# Allegro board d7-water-2024030401.brd
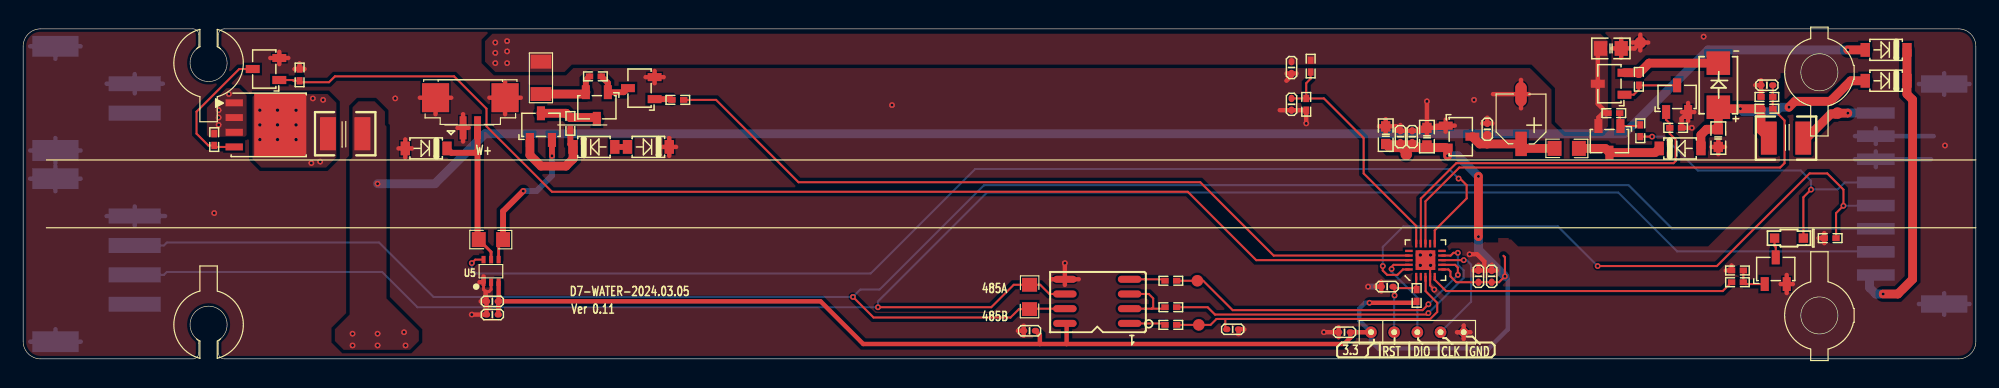
[diagram p0: board, top side]
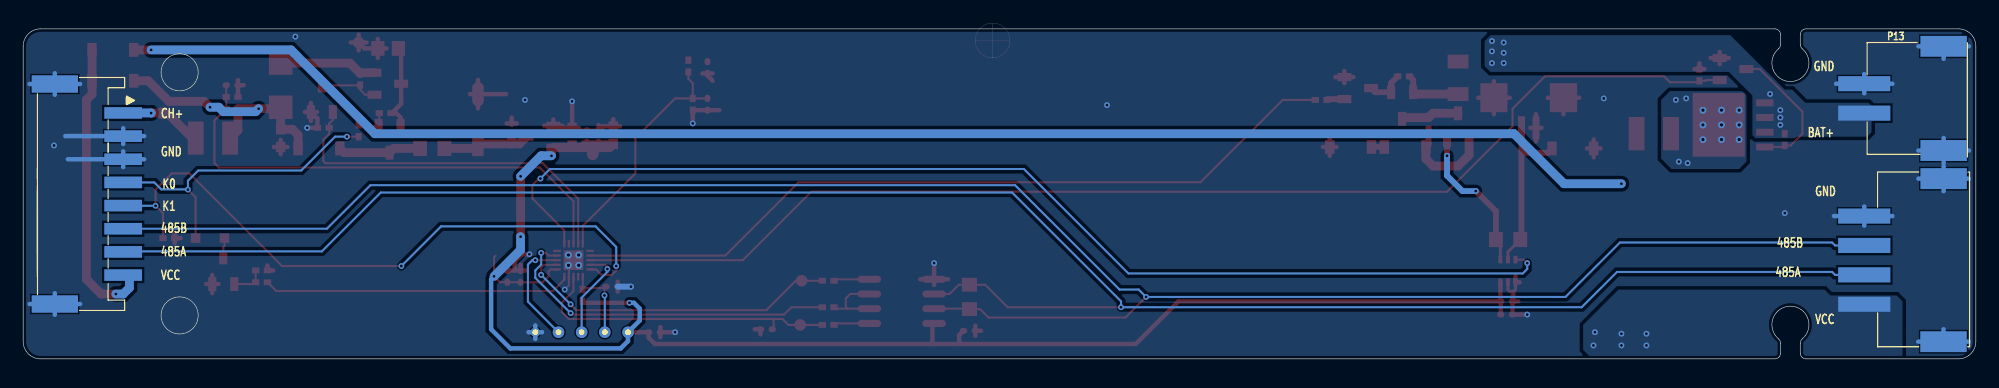
[diagram p1: board, bottom side, seen from below]

Outline 168.5 x 28.5 mm; copper layers: TOP, BOTTOM. Coordinates in mm from the lower left corner of the outline.
Outline path: circle c155,24.75 r1.6 ; circle c155,3.75 r1.6 ; 0,27 0,1.5 arc(0.44,0.44) 1.5,0 14.65,0 arc(15,0.15) 15.15,0.5 15.15,1.34 arc(15.1,1.55) 14.97,1.72 arc(16,4.55) 17.03,1.72 arc(16.9,1.55) 16.85,1.34 16.85,0.5 arc(17,0.15) 17.35,0 167,0 arc(168.06,0.44) 168.5,1.5 168.5,27 arc(168.06,28.06) 167,28.5 17.35,28.5 arc(17,28.35) 16.85,28 16.85,27.16 arc(16.9,26.95) 17.03,26.78 arc(16,23.95) 14.97,26.78 arc(15.1,26.95) 15.15,27.16 15.15,28 arc(15,28.35) 14.65,28.5 1.5,28.5 arc(0.44,28.06) 0,27

## Design rules (mm)
net group POWER: nets +3.3V CH+ N1716048 VIN W+

## Placement (name value [footprint] x y rotation side)
C2  104  [C0603]  146.28 19.06 270 top
C4  104  [C0402]  126.34 19.83 90 top
C5  22uF/6.3V  [C0603]  117.58 19.32 90 top
C6  22uF/6.3V  [C0603]  121.13 19.19 90 top
C7  103  [C0402]  118.85 19.19 90 top
C8  104  [C0402]  119.86 19.19 90 top
C14  104  [C0402]  150.47 23.64 180 top
C15  104  [C0402]  40.49 3.82 180 top
C26  105  [C0402]  126.72 7.13 90 top
C31  104  [C0402]  109.45 25.16 90 top
C32  104  [C0402]  109.45 21.98 270 top
C43  105  [C0402]  40.49 4.97 0 top
C54  105  [C0402]  114.02 2.3 180 top
C55  105  [C0402]  125.58 7.13 90 top
C56  103  [C0402]  86.84 2.43 180 top
C60  104  [C0402]  117.7 6.24 0 top
C61  103  [C0402]  104.37 2.55 180 top
D1  ST34F  [SMA]  146.28 23.64 270 top
D2  3.6V  [SOD_323]  152.38 10.43 0 top
D4  IN5819WS  [SOD123]  34.77 18.17 180 top
D5  BZT52C12  [SOD123]  49.25 18.3 0 top
D8  B5817W  [SOD123]  53.95 18.3 180 top
D10  IN4001  [SOD123]  142.98 18.17 0 top
D11  IN4001  [SOD123]  160.76 24.02 180 top
D12  IN4001  [SOD123]  160.76 26.68 180 top
EC1  4.7UF/25V  [C0805]  137.01 26.81 0 top
EC2  10UF/35V  [CAP_SMD_040X054]  129.26 20.71 270 top
F1  1100mA/16V  [1210]  152.12 19.06 180 top
F3  0.5R  [1210]  27.79 19.44 0 top
F4  16V/1A  [R1206]  44.68 24.27 270 top
P2  8PIN  [CON_008_SMD_WT_P020]  159.87 14.24 270 bottom
P5  2.54 4PIN  [CON_XH_254_4P]  9.63 8.52 90 bottom
P12  HEADER 4  [CON_125_02P_WT_H]  38.58 19.95 180 top
P13  HEADER 4  [CON_XH_254_2P]  9.63 21.22 90 bottom
P14  HEADER 5  [DEBUG5_DIP]  116.31 2.3 0 top
Q2  2N7002  [SOT_23]  142.72 22.62 0 top
Q3  MMBT3906  [SOT_23]  136.88 18.81 180 top
Q4  2N7002  [SOT_23]  20.8 25.03 90 top
Q5  2N7002  [SOT_23]  151.23 7.76 0 top
Q6  ss8050  [SOT_23]  44.68 20.21 0 top
Q7  2N3904  [SOT_23]  53.19 23.38 90 top
QL2  AON7401-HXY  [DFN5X6_8L]  21.18 20.21 0 top
QL3  Si2319DS  [SOT_23]  136.88 23.76 90 top
QL5  Si2319DS  [SOT_23]  49.51 21.73 180 top
R1  10R  [R0805]  133.2 18.17 0 top
R3  10K  [R0402]  150.47 21.6 180 top
R4  510K  [R0402]  139.42 24.14 90 top
R7  1K  [R0402]  150.47 22.62 0 top
R19  100K  [R0402]  23.85 24.52 270 top
R20  1K  [R0402]  147.93 6.62 180 top
R22  3K  [R0402]  155.93 10.43 0 top
R26  10M  [R0402]  111.1 25.29 90 top
R27  1.6M  [R0402]  110.72 21.98 270 top
R32  1.7K  [R0402]  47.22 20.33 90 top
R36  100K  [R0402]  147.93 7.63 0 top
R41  10R  [R0402]  99.04 6.74 0 top
R44  5.1K  [R0402]  16.49 18.94 270 top
R72  10R  [R0402]  99.04 4.46 0 top
R73  10R  [R0402]  99.04 2.93 0 top
R74  120R  [R0805]  86.84 5.35 90 top
R77  100K  [R0402]  137.26 21.22 180 top
R78  5.6K  [R0402]  139.55 19.7 90 top
R87  2K  [R0402]  56.49 22.37 0 top
R88  5.1K  [R0402]  49.38 24.4 0 top
R89  10K  [R0402]  120.24 5.47 270 top
R90  100K  [R0402]  142.6 19.95 180 top
RL2  100mR 1% 250mW  [R0805]  40.36 10.3 180 top
T1  TP_0.8mm  [TP_10]  156.57 21.22 0 top
T3  TP_0.8mm  [TP_10]  139.55 27.32 0 top
T8  TP_0.8mm  [TP_10]  119.36 17.67 0 top
T20  TP_0.8mm  [TP_10]  101.45 2.93 0 top
T21  TP_0.8mm  [TP_10]  101.32 6.74 0 top
U1  RS7533-1YF3  [SOT_23]  124.05 19.19 270 top
U5  TPA191  [SOT-363]  39.73 6.62 90 top
U12  CS48505S  [SO_8]  92.69 4.97 180 top
U14  HK32F0301MF4N7C  [QFN020Q_P040_035X035]  121.01 8.52 0 top

## Library data of the parts
C2 C4-C8 C14 C15 C26 C31 C32 C43 C54-C56 C61 EC1 = C_4
C60 EC2 = C_0
D1 = ZHCS1000/SOT_10
D2 = DIODE BREAKDOWN
D4 = ZHCS1000/SOT_12
D5 = DIODE BREAKDOWN_0
D8 = DIODE SCHOTTKY_2
D10-D12 = DIODE SCHOTTKY_3
F1 F3 F4 = FUSE
P2 = HEADER 12_12
P5 = HEADER 4_5
P12 P13 = HEADER 4_11
P14 = HEADER 4_9
Q2 Q5 = 2N7002_0
Q3 = PNP BCE_2
Q4 = 2N7002
Q6 = 2N3904_10
Q7 = 2N3904_0
QL2 = P DGS_5
QL3 = P DGS_2
QL5 = MOSFET P DGS_1
R1 R3 R4 R7 R19 R20 R22 R26 R27 R32 R36 R41 R44 R72-R74 R77 R78 R87 R88 R90 RL2 = R_1
R89 = R_0
T1 T3 T8 T20 T21 = TestPoint
U1 = UPC2746T/SOT_5
U5 = LM3875/TO220_8
U12 = LM3875/TO220_6
U14 = BA3430F/SO_11

## Footprints (pads in the part's own frame, mm; a bottom-side part is the same pattern mirrored in y, then rotated)
1210
  custom 1.372x2.87 smd: 1(-1.486,0) 2(1.486,0)
C0402
  oval 0.635x0.508 smd: 1(-0.508,0) 2(0.508,0)
C0603
  rect 0.889x0.813 smd: 1(-0.762,0) 2(0.762,0)
C0805
  rect 1.143x1.27 smd: 1(-0.889,0) 2(0.889,0)
CAP_SMD_040X054
  rect 2.1x1 smd: 1(2.153,-0.004)
  oval 2.1x1 smd: 2(-2.148,-0.01)
CON_008_SMD_WT_P020
  rect 1x3.25 smd: 1(-7,0) 2(-5,0) 3(-3,0) 4(-1,0) 5(1,0) 6(3,0) 7(5,0) 8(7,0)
  rect 1.5x4 smd: 9(-9.5,-5.9) 10(9.5,-5.9)
CON_125_02P_WT_H
  rect 0.6x2 smd: 1(0.625,0) 2(-0.625,0)
  rect 2.35x2.5 smd: 3(-3,-2.6) 4(3,-2.6)
CON_XH_254_2P
  rect 1.3x4.5 smd: 1(0,0) 2(2.54,0)
  rect 1.8x4 smd: 3(-3.23,-6.85) 4(5.77,-6.85)
CON_XH_254_4P
  rect 1.3x4.5 smd: 1(-3.81,0) 2(-1.27,0) 3(1.27,0) 4(3.81,0)
  rect 1.8x4 smd: 5(7.04,-6.85) 6(-7.04,-6.84)
DEBUG5_DIP
  round 1 hole 0.5: 1(0,0) 2(2,0) 3(4,0) 4(6,0)
  round 0.8 hole 0.5: 5(8,0)
DFN5X6_8L
  rect 1.5x0.6 smd: 1(-2.975,1.905) 2(-2.975,0.635) 3(-2.975,-0.635) 4(-2.975,-1.905)
  rect 4.5x5.5 smd: 5(1,0)
QFN020Q_P040_035X035
  rect 0.197x0.66 smd: 1(-0.8,-1.427) 2(-0.4,-1.427) 3(0,-1.427) 4(0.4,-1.427) 5(0.8,-1.427) 11(0.8,1.427) 12(0.4,1.427) 13(0,1.427) 14(-0.4,1.427) 15(-0.8,1.427)
  rect 0.66x0.197 smd: 6(1.427,-0.8) 7(1.427,-0.4) 8(1.427,0) 9(1.427,0.4) 10(1.427,0.8) 16(-1.427,0.8) 17(-1.427,0.4) 18(-1.427,0) 19(-1.427,-0.4) 20(-1.427,-0.8)
  rect 1.7x1.7 smd: 21(0,0)
R0402
  rect 0.635x0.508 smd: 1(-0.508,0) 2(0.508,0)
R0805
  rect 1.2x1.3 smd: 1(-1.05,0) 2(1.05,0)
R1206
  rect 1.2x1.8 smd: 1(-1.4,0) 2(1.4,0)
SMA
  rect 2.032x2.032 smd: A(1.905,0) C(-1.905,0)
SO_8
  oval 2.032x0.61 smd: 1(-2.794,1.905) 2(-2.794,0.635) 3(-2.794,-0.635) 4(-2.794,-1.905) 5(2.794,-1.905) 6(2.794,-0.635) 7(2.794,0.635) 8(2.794,1.905)
SOD123
  rect 0.813x1.194 smd: 1(-1.8,0) 2(1.8,0)
SOD_323
  rect 0.813x0.813 smd: 1(1.245,0) 2(-1.245,0)
SOT-363
  rect 0.65x0.35 smd: 1(0,0) 2(0,-0.65) 3(0,-1.3) 4(1.95,-1.3) 5(1.95,-0.65) 6(1.95,0)
SOT_23
  rect 0.7x1.2 smd: 1(-0.95,-1.3) 2(0.95,-1.3) 3(0,1)
TP_10
  round 1 smd: 1(0,0)

## Nets
+3.3V: C5.1(A) C6.1(A) C7.1(A) C8.1(A) C15.1(A) C26.1(A) C43.2(B) C54.1(A) C55.1(A) C56.1(A) P14.1 R89.2(B) T8.1 U1.2(VOUT) U5.3(VDD) U12.8(VCC) U14.6(VDD)
VIN: D10.1(CATHODE) Q3.3(C) R1.2(B)
485A: P2.7 P5.2 R74.2(B) U12.6(A)
485B: P2.6 P5.3 R74.1(A) U12.7(B)
AN_VBAT: C32.1(A) R26.1(A) R27.1(A) U14.15(PD1/A5)
AN_VIN: C14.1(A) R3.1(A) R7.2(B) U14.13(PC6/A6)
AN_WATER: U5.6(OUT) U14.11(PC4/A2)
B+: C31.2(B) EC1.1(A) F4.1 P13.1 Q3.2(E) QL2.1(S1) QL2.2(S2) QL2.3(S3) QL3.3(D) R26.2(B) R44.1(A) R77.2(B)
B-: C2.2(B) C4.2(B) C5.2(B) C6.2(B) C7.2(B) C8.2(B) C14.2(B) C15.2(B) C26.2(B) C31.1(A) C32.2(B) C43.1(A) C54.2(B) C55.2(B) C56.2(B) C60.1(A) C61.1(A) D4.2(ANODE) D8.1(CATHODE) EC1.2(B) EC2.2(B) P2.2 P2.3 P2.9 P2.10 P5.4 P5.5(M1) P5.6(M2) P12.1 P12.3 P12.4 P13.2 P13.3 P13.4 P14.5 Q2.2(SOURCE) Q4.2(SOURCE) Q5.2(SOURCE) Q7.2(EMITTER) R7.1(A) R19.1(A) R22.1(A) R27.2(B) R36.1(A) R90.1(A) T3.1 U1.1(GND) U5.1(REF) U5.2(GND) U12.5(GND) U14.4(VSS) U14.21(PG)
CH+: F1.1 P2.1 T1.1
CH_IN: C2.1(A) D1.A(ANODE) D10.2(ANODE) D11.2(ANODE) F1.2 R3.2(B)
DR: R72.2(B) U14.9(PB4)
EN_CH: Q2.1(GATE) R90.2(B) U14.14(PC7)
EN_PWRIN: R20.2(B) U14.5(PD7)
EN_PWROUT: Q4.1(GATE) R19.2(B) U14.18(PD4)
EN_WATER: R87.2(B) U14.17(PD3/A3)
IN_CLEAR: U14.16(PD2/A4)
K10: D2.1(CATHODE) P2.4 R78.1(A)
K11: P2.5 R22.2(B) U14.20(PD6/A1)
PWR_OUT: D12.2(ANODE) F3.2 P5.1
REST: C60.2(B) P14.2 R89.1(A) U14.1(PA0/NRST)
SWCLK: P14.4 U14.8(PB5/SWCLK)
SWDIO: P14.3 U14.19(PD5/SWDIO/A0)
U1_RX: C61.2(B) R73.2(B) T20.1 U14.3(PA2)
U1_TX: R41.2(B) T21.1 U14.7(PA3)
W+: D4.1(CATHODE) P12.2 RL2.2(B) U5.5(IN-)
WATER: Q6.2(EMITTER) RL2.1(A) U5.4(IN+)
N1534729: R41.1(A) U12.4(DI)
N1534781: R72.1(A) U12.2(RE#) U12.3(DE)
N1534911: R73.1(A) U12.1(RO)
N1536535: D1.C(CATHODE) QL3.2(S) R4.2(B)
N1536653: C4.1(A) EC2.1(A) R1.1(A) U1.3(VDD)
N1536845: Q2.3(DRAIN) QL3.1(G) R4.1(A)
N1543830: Q5.1(GATE) R20.1(A) R36.2(B)
N1543852: Q3.1(B) R77.1(A) R78.2(B)
N1547833: D2.2(ANODE) Q5.3(DRAIN)
N1557811: F3.1 QL2.5(D1)
N1557847: Q4.3(DRAIN) QL2.4(G) R44.2(B)
N1715992: D5.1(CATHODE) Q6.1(BASE) R32.1(A)
N1716040: D5.2(ANODE) D8.2(ANODE)
N1716048: Q6.3(COLLECTOR) QL5.3(D) R32.2(B)
N1716300: Q7.1(BASE) R87.1(A)
N1716328: F4.2 QL5.2(S) R88.1(A)
N1716336: Q7.3(COLLECTOR) QL5.1(G) R88.2(B)
N1786994: D11.1(CATHODE) D12.1(CATHODE) P2.8

Pads without a net: U14 2 10 12

## Via types
v1: diameter 0.508, hole 0.254, TOP to BOTTOM, 64 vias
v2: diameter 0.6, hole 0.3, TOP to BOTTOM, 13 vias

## Routing (per net, layer and track width the routed paths; a pad name or vN(x,y) marks a point on that pad's centre or on a via; arc(x,y) is an arc through that point)
+3.3V: length 143.3
  TOP w0.178: 127.74,8.9 127.86,8.78 v1(127.86,7.13) 127.36,6.62 C26.1 C55.1 123.67,6.62 123.17,7.13 123.17,7.54 122.99,7.72 U14.6
  TOP w0.381: T8.1 119.23,17.67 118.85,18.05 C7.1 ; U5.3 41.03,5 C43.2 ; 90.04,1.3 90.04,2.91 89.89,3.06 ; 90.04,1.3 90.02,1.28 87.73,1.28 ; 90.04,1.3 90.06,1.28 113.98,1.28 114.53,1.83 C54.1 P14.1 ; v1(116.18,4.84) 120.12,4.84 R89.2 ; C7.1 C8.1 120.12,18.68 120.38,18.43 C6.1 122.57,18.43 U1.2 ; C7.1 117.97,18.68 117.84,18.56 C5.1 ; 87.35,2.43 87.73,2.05 87.73,1.28 ; 87.73,1.28 72.49,1.28 68.81,4.97 C43.2 ; C43.2 C15.1
  TOP w0.762: v1(122.91,17.54) 122.91,18.08 U1.2 117.89,18.24 C5.1 ; v1(125.58,15.76) v1(125.58,10.55)
  BOTTOM w0.381: v1(116.18,4.84) 115.8,4.84 115.29,4.33 115.29,3.32 P14.1 116.31,1.54 116.94,0.9 126.47,0.9 128.12,2.55 128.12,6.87 v1(127.86,7.13)
  BOTTOM w0.762: v1(127.86,7.13) 125.58,9.41 v1(125.58,10.55) ; v1(122.91,17.54) 123.8,17.54 v1(125.58,15.76)
VIN: length 7.2
  TOP w0.762: D10.1 140.81,17.81 Q3.3 136.52,18.17 R1.2
485A: length 175.4
  TOP w0.178: v1(73.76,4.46) 83.54,4.46 85.48,6.4 R74.2 87.76,6.4 88.56,5.6 89.89,5.6
  BOTTOM w0.178: P5.2 12.14,7.25 12.4,7.51 30.96,7.51 34.01,4.46 v1(73.76,4.46) 73.76,4.97 83.16,14.36 137.64,14.36 142.72,9.28 159.82,9.28 P2.7
485B: length 177.2
  TOP w0.178: v1(71.6,5.35) 73.38,3.57 85.2,3.57 85.93,4.3 R74.1 87.22,4.3 87.26,4.33 89.89,4.33
  BOTTOM w0.178: P5.3 12.14,9.79 12.4,10.05 30.71,10.05 35.41,5.35 v1(71.6,5.35) 72.24,5.98 73.89,5.98 82.91,15 138.53,15 142.29,11.24 P2.6
AN_VBAT: length 21.1
  TOP w0.178: C32.1 R27.1 ; R27.1 110.72,23.81 111.1,24.19 R26.1 ; R27.1 112.24,22.49 115.67,19.06 115.67,16.02 120.21,11.48 U14.15
AN_VIN: length 43.2
  TOP w0.178: C14.1 R7.2 R3.1 151.99,20.59 151.99,16.9 151.61,16.52 123.93,16.52 121.01,13.6 U14.13
AN_WATER: length 98.2
  TOP w0.178: v1(38.71,8.27) 39.01,8.57 U5.6 ; U14.11 121.81,11.1 124.56,13.86 124.56,15 123.99,15.57 v1(123.86,15.57)
  BOTTOM w0.178: v1(38.71,8.27) 38.71,7.76 39.09,7.38 73.13,7.38 82.14,16.4 123.04,16.4 v1(123.86,15.57)
B+: length 7.7
  TOP w0.381: Q3.2 135.93,20.84 136.31,21.22 136.69,21.22 ; 136.69,21.22 135.88,22.03 QL3.3 135.88,26.57 EC1.1 ; 136.69,21.22 R77.2
  vias: v1(16.87,21.48) v1(16.87,20.84) v1(16.87,20.21) v1(17.76,22.87) v1(40.74,27.32) v1(40.74,26.43) v1(40.74,25.54) v1(41.76,27.45) v1(41.76,26.56) v1(41.76,25.54)
B-: length 168.9
  TOP w0.178: v2(121.45,8.08) 121.41,8.03 U14.4 121.41,6.34 v1(121.77,5.98)
  TOP w0.254: U5.2 40.38,5.98 40.2,5.8 39.91,5.8 39.73,5.98 U5.1
  TOP w0.381: EC2.2 129.25,24.09 ; EC2.2 126.84,22.86 ; EC2.2 129.93,22.86 ; EC2.2 129.25,21.63 ; C14.2 149.96,24.07 ; C14.2 R7.1 ; C14.2 149.47,23.64 ; 117.58,19.46 C5.2 ; C5.2 116.99,20.08 ; C5.2 117.58,20.7 ; C5.2 118.47,20.08 C7.2 ; C7.2 C8.2 120.88,19.7 C6.2 ; C7.2 118.42,19.7 ; C7.2 118.85,20.19 ; 32.39,18.17 32.97,18.17 ; 32.97,18.17 32.97,18.95 ; 32.97,18.17 33.56,18.17 ; 32.97,18.17 32.97,17.4 ; 123.73,2.3 P14.5 ; P14.5 124.31,2.88 ; P14.5 124.31,1.72 ; P14.5 124.89,2.3 ; C31.1 109.45,24.46 109.01,24.02 ; C31.1 109.02,24.65 ; C31.1 109.88,24.65 ; 122.75,19.61 U1.1 ; U1.1 121.98,20.14 ; U1.1 122.75,20.67 ; U1.1 123.53,20.14 ; U1.1 122.57,19.95 C6.2 ; 55.17,18.3 D8.1 ; D8.1 55.75,17.53 ; D8.1 56.34,18.3 ; D8.1 55.75,19.08 ; C54.2 113.51,2.73 ; C54.2 v1(112.24,2.3) ; C54.2 113.51,1.87 ; 22.1,25.45 Q4.2 ; Q4.2 22.88,25.98 ; Q4.2 21.33,25.98 ; Q4.2 22.1,26.51 ; T3.1 140.23,27.32 ; T3.1 139.55,28 ; T3.1 138.87,27.32 ; T3.1 139.04,26.81 EC1.2 ; T3.1 139.55,26.64 ; v1(143.99,19.95) 143.1,19.95 143.1,20.75 Q2.2 ; Q5.2 152.18,7.24 ; Q5.2 151.65,6.46 ; Q5.2 152.71,6.46 ; Q5.2 152.18,5.68 ; P12.1 37.96,21.13 ; P12.1 37.48,19.95 ; P12.1 38.44,19.95 ; P12.1 37.96,18.77 ; P12.3 41.58,23.98 ; P12.3 42.94,22.55 ; P12.3 40.23,22.55 ; P12.3 41.58,21.12 ; C26.2 127.15,7.63 ; C26.2 126.72,8.13 ; C26.2 126.09,7.63 ; 126.09,7.63 126.09,8.4 125.45,9.03 v1(124.82,9.03) ; 126.09,7.63 C55.2 ; 121.13,19.33 C6.2 ; C6.2 120.55,19.95 ; C6.2 v1(121.13,22.24) ; C55.2 125.58,8.13 ; C55.2 125.15,7.63 ; Q2.2 143.67,22.1 ; Q2.2 143.15,21.32 ; Q2.2 144.2,21.32 ; Q2.2 143.67,20.54 ; R19.1 24.28,25.03 ; R19.1 23.85,25.53 ; R19.1 23.42,25.03 ; 117.2,5.8 C60.1 ; C60.1 117.2,6.67 ; C60.1 116.7,6.24 ; C43.1 39.91,5.04 39.91,5.8 ; C43.1 C15.2 v1(38.71,3.82) ; C43.1 39.48,4.97 ; C43.1 39.98,5.4 ; EC1.2 137.9,27.62 ; EC1.2 137.9,26 ; EC1.2 137.15,26.81 ; 39.73,7.12 U5.1 39.37,6.62 ; 108.43,21.48 C32.2 R27.2 v1(110.72,20.33) ; 88.7,6.87 89.89,6.87 ; 89.89,6.87 91.09,6.87 ; 89.89,6.87 v1(89.89,8.27) ; 89.89,6.87 89.89,6.39 ; 146.28,17.68 C2.2 ; C2.2 146.28,18.92 ; C2.2 145.69,18.3 ; C2.2 146.86,18.3 ; 105.37,2.55 C61.1 104.88,2.12 ; 155.42,10.43 155.42,10.86 ; 155.42,10.43 154.93,10.43 ; 155.42,10.43 155.42,9.99 ; 146.93,7.63 R36.1 147.42,8.07 ; P12.4 36.94,22.55 ; P12.4 34.23,22.55 ; P12.4 35.58,21.12 ; C56.2 86.34,2.86 ; C56.2 85.84,2.43 ; C56.2 86.34,1.99 ; 125.91,20.33 C4.2 ; C4.2 126.77,20.33 ; C4.2 126.34,20.83 ; 53.71,24.33 Q7.2 ; Q7.2 55.27,24.33 ; Q7.2 54.49,23.8 ; Q7.2 54.49,24.86
  BOTTOM w0.381: P5.4 12.25,12.33 ; P5.4 9.63,13.16 ; P5.4 9.63,11.5 ; P5.4 7.2,12.33 ; 165.77,22.81 P2.9 ; P2.9 167.95,23.74 ; P2.9 163.59,23.74 ; P2.9 165.77,24.67 ; P13.2 12.06,23.76 ; P13.2 9.63,24.59 ; P13.2 7.2,23.76 ; P13.2 9.63,22.93 ; 2.78,16.91 P13.3 ; P13.3 4.96,17.99 ; P13.3 0.6,17.99 ; P13.3 2.78,19.07 ; P5.5 4.96,15.56 ; P5.5 2.78,16.64 ; P5.5 2.78,14.48 ; P5.5 0.6,15.56 ; P2.3 164.65,17.24 ; P2.3 159.87,17.92 ; P2.3 159.87,16.56 ; P2.3 158.07,17.24 ; P5.6 2.79,2.56 ; P5.6 4.97,1.48 ; P5.6 0.61,1.48 ; 165.77,3.81 P2.10 ; P2.10 165.77,5.67 ; P2.10 163.59,4.74 ; P2.10 167.95,4.74 ; 123.73,2.3 P14.5 ; P14.5 124.89,2.3 ; P14.5 124.31,1.72 ; P14.5 124.31,2.88 ; 0.6,26.99 P13.4 ; P13.4 2.78,25.91 ; P13.4 4.96,26.99 ; 158.07,19.24 P2.2 ; P2.2 164.87,19.24 ; P2.2 159.87,19.92 ; P2.2 159.87,18.56
  BOTTOM w0.508: C60.1 v1(116.05,6.24)
  vias: v1(16.49,12.59) v1(32.11,22.49) v1(74.97,21.92) v1(125.2,22.37) v1(145.01,27.83) v1(165.84,18.43) v2(120.56,8.97) v2(120.56,8.08) v2(121.45,8.97)
CH+: length 7.2
  TOP w0.762: F1.1 153.9,19.06 155.99,21.15 156.33,21.15 156.4,21.22 T1.1 v1(157.46,21.22)
  BOTTOM w0.762: P2.1 157.47,21.24 v1(157.46,21.22)
CH_IN: length 23.3
  TOP w0.762: F1.2 149.96,19.74 R3.2 v1(148.18,21.6) 146.41,21.6 D1.A C2.1 145.26,19.83 144.78,19.34 D10.2 ; v1(152.38,21.73) 152.88,22.24 155.93,22.24 157.71,24.02 D11.2
  BOTTOM w0.762: v1(148.18,21.6) 148.44,21.35 151.23,21.35 151.61,21.73 v1(152.38,21.73)
DR: length 30.2
  TOP w0.178: U14.9 123.18,8.92 123.42,9.16 v1(123.8,9.16) ; v1(121.26,3.95) 121.13,3.82 102.85,3.82 102.21,4.46 99.54,4.46
  BOTTOM w0.178: v1(123.8,9.16) 123.8,8.14 124.31,7.63 124.31,7 v1(121.26,3.95)
EN_CH: length 31.8
  TOP w0.178: U14.14 120.61,13.84 123.67,16.9 142.42,16.9 142.6,17.08 142.6,18.94 142.09,19.44 R90.2 142.09,20.33 141.77,20.65 Q2.1
EN_PWRIN: length 26.6
  TOP w0.178: U14.5 121.81,6.83 122.78,5.86 146.66,5.86 R20.2
EN_PWROUT: length 105.2
  TOP w0.178: U14.18 106.4,8.52 100.5,14.43 45.63,14.43 39.98,20.08 39.98,21.6 37.19,24.4 26.9,24.4 26.39,23.89 23.98,23.89 R19.2 23.33,24.02 23.27,24.08 Q4.1
EN_WATER: length 68.1
  TOP w0.178: U14.17 107.91,8.92 101.58,15.25 66.9,15.25 59.79,22.37 R87.2
K10: length 27.4
  TOP w0.178: D2.1 153.62,13.96 v1(154.28,14.62) ; R78.1 v1(140.56,19.19)
  BOTTOM w0.178: 154.28,14.64 v1(154.28,14.62) ; 154.28,14.64 156.59,14.64 157.19,15.24 P2.4 ; 154.28,14.64 154.28,15.38 153.39,16.27 144.5,16.27 141.58,19.19 v1(140.56,19.19)
K11: length 57.7
  TOP w0.178: v1(117.32,8.01) 117.32,7.63 117.7,7.25 118.59,7.25 119.06,7.72 U14.20 ; R22.2 156.44,12.59 v1(157.07,13.22) 157.07,14.62 155.68,16.02 154.15,16.02 146.15,8.01 v1(135.87,8.01)
  BOTTOM w0.178: P2.5 159.85,13.22 v1(157.07,13.22) ; v1(117.32,8.01) 117.32,9.67 119.1,11.44 132.44,11.44 v1(135.87,8.01)
PWR_OUT: length 133.2
  TOP w0.762: v1(157.46,26.68) D12.2
  BOTTOM w0.762: v1(30.58,15.13) 35.54,15.13 39.85,19.44 138.15,19.44 145.39,26.68 v1(157.46,26.68)
  vias: v1(28.42,2.17) v1(28.42,1.16) v1(30.58,2.17) v1(30.58,1.16) v1(32.87,2.3) v1(33,1.16)
REST: length 7
  TOP w0.178: 118.34,6.11 120.12,6.11 120.21,6.02 ; 118.34,6.11 v1(118.34,5.47) ; 118.34,6.11 C60.2 ; 120.21,6.02 U14.1 ; 120.21,6.02 R89.1
  BOTTOM w0.178: v1(118.34,5.47) 118.31,5.44 P14.2
SWCLK: length 9.6
  TOP w0.178: v1(124.31,8.52) U14.8
  BOTTOM w0.178: P14.4 124.94,4.94 124.94,8.14 124.56,8.52 v1(124.31,8.52)
SWDIO: length 8.1
  TOP w0.178: U14.19 118.26,8.12 118.09,7.94 v1(118.09,7.76)
  BOTTOM w0.178: v1(118.09,7.76) 118.09,7.51 120.31,5.28 P14.3
U1_RX: length 27.4
  TOP w0.178: 99.54,2.93 T20.1 102.46,2.93 102.97,3.44 103.73,3.44 ; 103.73,3.44 103.73,2.68 103.86,2.55 ; 103.73,3.44 121.42,3.44 122.02,4.05 122.02,4.84 121.02,5.84 121.02,6.73 121.02,6.73 121.02,7.09 U14.3
U1_TX: length 28.7
  TOP w0.178: v1(121.26,4.71) 121.13,4.59 120.75,4.2 104.37,4.2 101.83,6.74 T21.1 99.54,6.74 ; v1(123.8,7.25) 123.8,7.89 123.57,8.12 U14.7
  BOTTOM w0.178: v1(121.26,4.71) 121.39,4.84 v1(123.8,7.25)
W+: length 14.7
  TOP w0.254: U5.5 40.38,9.24 RL2.2
  TOP w0.508: RL2.2 39.21,10.4 39.21,17.87 ; D4.1 36.95,17.79 39.13,17.79 39.21,17.87 ; 39.21,17.87 39.21,19.95
WATER: length 12.9
  TOP w0.254: U5.4 41.03,9.92 RL2.1
  TOP w0.508: v1(45.63,17.54) Q6.2 ; RL2.1 41.41,12.75 v1(43.16,14.49)
  BOTTOM w0.508: v1(45.63,17.54) 45.63,15.82 44.3,14.49 v1(43.16,14.49)
N1534729: length 3.1
  TOP w0.178: R41.1 98.4,6.87 U12.4
N1534781: length 6.2
  TOP w0.178: U12.2 97.38,4.33 ; 97.38,4.33 97.51,4.46 97.51,5.22 97.13,5.6 U12.3 ; 97.38,4.33 98.4,4.33 R72.1
N1534911: length 3.1
  TOP w0.178: R73.1 98.4,3.06 U12.1
N1536535: length 8.5
  TOP w0.762: QL3.2 139.36,24.71 R4.2 140.31,25.54 D1.C
N1536653: length 8.3
  TOP w0.762: 125.05,19.19 125.68,18.56 126.34,18.56 ; 126.34,18.56 EC2.1 129.64,18.17 R1.1 ; 126.34,18.56 C4.1
N1536845: length 5.1
  TOP w0.178: QL3.1 138.98,22.81 139.42,23.25 R4.1 139.44,23.62 Q2.3
N1543830: length 2.9
  TOP w0.178: Q5.1 148.6,6.46 R20.1 R36.2
N1543852: length 2.9
  TOP w0.178: R78.2 139.45,20.11 Q3.1 137.77,20.17 R77.1
N1547833: length 1.7
  TOP w0.178: D2.2 151.13,9.75 151.23,9.65 Q5.3
N1557811:
  vias: v1(24.87,16.9) v1(24.99,22.49) v1(25.63,17.03) v1(25.88,22.37) v2(20.42,21.48) v2(20.42,20.21) v2(20.42,18.94) v2(21.95,21.48) v2(21.95,20.21) v2(21.95,18.94) v2(23.55,21.48) v2(23.55,20.21) v2(23.55,18.94)
N1557847: length 12
  TOP w0.178: QL2.4 16.61,18.3 R44.2 15.98,18.43 14.96,19.44 14.96,21.35 18.64,25.03 Q4.3
N1715992: length 8.3
  TOP w0.508: D5.1 47.22,18.53 R32.1
  TOP w0.762: Q6.1 43.73,17.6 44.68,16.65 46.84,16.65 47.45,17.26 D5.1
N1716040: length 1.1
  TOP w0.178: D8.2 52.02,18.3
  TOP w0.508: 52.02,18.3 D5.2
N1716048: length 5
  TOP w0.762: Q6.3 46.85,21.21 R32.2 49.39,20.84 QL5.3
N1716300: length 1.5
  TOP w0.508: Q7.1 55.92,22.43 R87.1
N1716328: length 5.4
  TOP w0.508: QL5.2 48.56,24.08 R88.1
  TOP w0.762: QL5.2 48.4,22.87 F4.2
N1716336: length 3.5
  TOP w0.508: Q7.3 51.84,23.03 QL5.1 50.46,23.83 R88.2
N1786994: length 26.1
  TOP w0.762: D12.1 D11.1 162.56,22.86 163.04,22.37 163.04,6.87 161.77,5.6 v1(160.5,5.6)
  BOTTOM w0.762: v1(160.5,5.6) 159.87,5.6 159.33,6.14 159.33,7.22 159.35,7.24 P2.8

## Copper pours and planes (outline as drawn; the poured copper is in the pictures)
B+ on TOP: 39.85,27.45 39.85,25.67 40.74,24.78 46.71,24.78 47.35,25.41 130.15,25.41 132.18,23.38 132.18,20.46 133.07,19.57 136.25,19.57 136.75,20.08 136.75,27.45 136.12,28.08 40.49,28.08
B+ on TOP: 19.15,19.19 15.98,19.19 15.85,19.32 15.85,21.73 17.5,23.38 18.64,23.38 19.28,22.75 19.28,19.32
B+ on BOTTOM: 15.6,19.06 15.47,19.19 9.37,19.19 8.99,19.57 8.99,21.86 9.25,22.11 14.71,22.11 15.85,23.25 16.49,23.25 21.18,27.95 41.89,27.95 42.39,27.45 42.39,25.29 41.89,24.78 21.31,24.78 19.28,22.75 19.28,19.32 19.03,19.06
B- on TOP: 1.5,0.25 0.62,0.62 0.25,1.5 0.25,27 0.62,27.88 1.5,28.25 14.65,28.25 14.82,28.17 14.9,28 14.9,27.16 14.87,27.05 14.81,26.97 16,23.7 17.19,26.97 17.13,27.05 17.1,27.16 17.1,28 17.18,28.17 17.35,28.25 167,28.25 167.88,27.88 168.25,27 168.25,1.5 167.88,0.62 167,0.25 17.35,0.25 17.18,0.33 17.1,0.5 17.1,1.34 17.13,1.45 17.19,1.53 16,4.8 14.81,1.53 14.87,1.45 14.9,1.34 14.9,0.5 14.82,0.33 14.65,0.25 ; 9 cut-outs
B- on BOTTOM: 1.5,0.25 0.62,0.62 0.25,1.5 0.25,27 0.62,27.88 1.5,28.25 14.65,28.25 14.82,28.17 14.9,28 14.9,27.16 14.87,27.05 14.81,26.97 16,23.7 17.19,26.97 17.13,27.05 17.1,27.16 17.1,28 17.18,28.17 17.35,28.25 167,28.25 167.88,27.88 168.25,27 168.25,1.5 167.88,0.62 167,0.25 17.35,0.25 17.18,0.33 17.1,0.5 17.1,1.34 17.13,1.45 17.19,1.53 16,4.8 14.81,1.53 14.87,1.45 14.9,1.34 14.9,0.5 14.82,0.33 14.65,0.25 ; 3 cut-outs
PWR_OUT on TOP: 31.22,20.21 31.22,21.35 30.33,22.24 28.93,22.24 28.42,21.73 28.42,17.41 28.17,17.16 28.17,3.82 26.9,2.55 26.9,1.54 27.66,0.78 33.38,0.78 34.14,1.54 34.14,2.43 31.34,5.22 31.34,20.08
PWR_OUT on BOTTOM: 6.33,0.25 6.33,4.97 6.83,5.47 12.55,5.47 13.06,5.98 30.84,5.98 33.88,2.93 33.88,0.78 33.36,0.25 17.35,0.25 17.18,0.33 17.1,0.5 17.1,1.34 17.13,1.45 17.19,1.53 16,4.8 14.81,1.53 14.87,1.45 14.9,1.34 14.9,0.5 14.82,0.33 14.65,0.25
N1557811 on TOP: 20.04,22.87 26.26,22.87 27.03,22.11 27.03,17.41 26.14,16.52 20.55,16.52 19.79,17.29 19.79,22.62
N1557811 on BOTTOM: 19.79,22.75 19.79,17.03 20.42,16.4 26.26,16.4 27.15,17.29 27.15,22.37 26.39,23.13 20.17,23.13

## Text on the board
Ref Des/Silkscreen Bottom: GND | VCC | BAT+ | 485B | 485A | K0 | K1 | CH+
Ref Des/Silkscreen Top: W+ | D7-WATER-2024.03.05 | Ver 0.11 | 485A | 485B | 3.3 | RST | DIO | CLK | GND
DIMENSION: R1 | C6 | C28 | D7 | R26 | P5 | C17 | C8 | C18 | C24 | R19 | Q5 | D4 | C32 | R42 | RL1 | R41 | U1 | R31 | C19 | R16 | R27 | Q3 | U3 | R24 | R18 | C44 | C43 | R17 | R22 | EC1 | C15 | F2 | C29 | R23 | R21 | D2 | T12 | U2 | R25 | C10 | T13 | T11 | T2 | T5 | T3 | T6 | QL4 | T14 | C9 | P4 | C7
